# Altium PCB Mach_In.PcbDoc
Units mm, origin at the board's own origin, x right, y up, seen from the top; angles counter-clockwise.
Board outline 115.95 x 75.06 mm, 2 copper layers (Top Layer, Bottom Layer); 84 components, 24 nets, 357 pads, 0 vias.
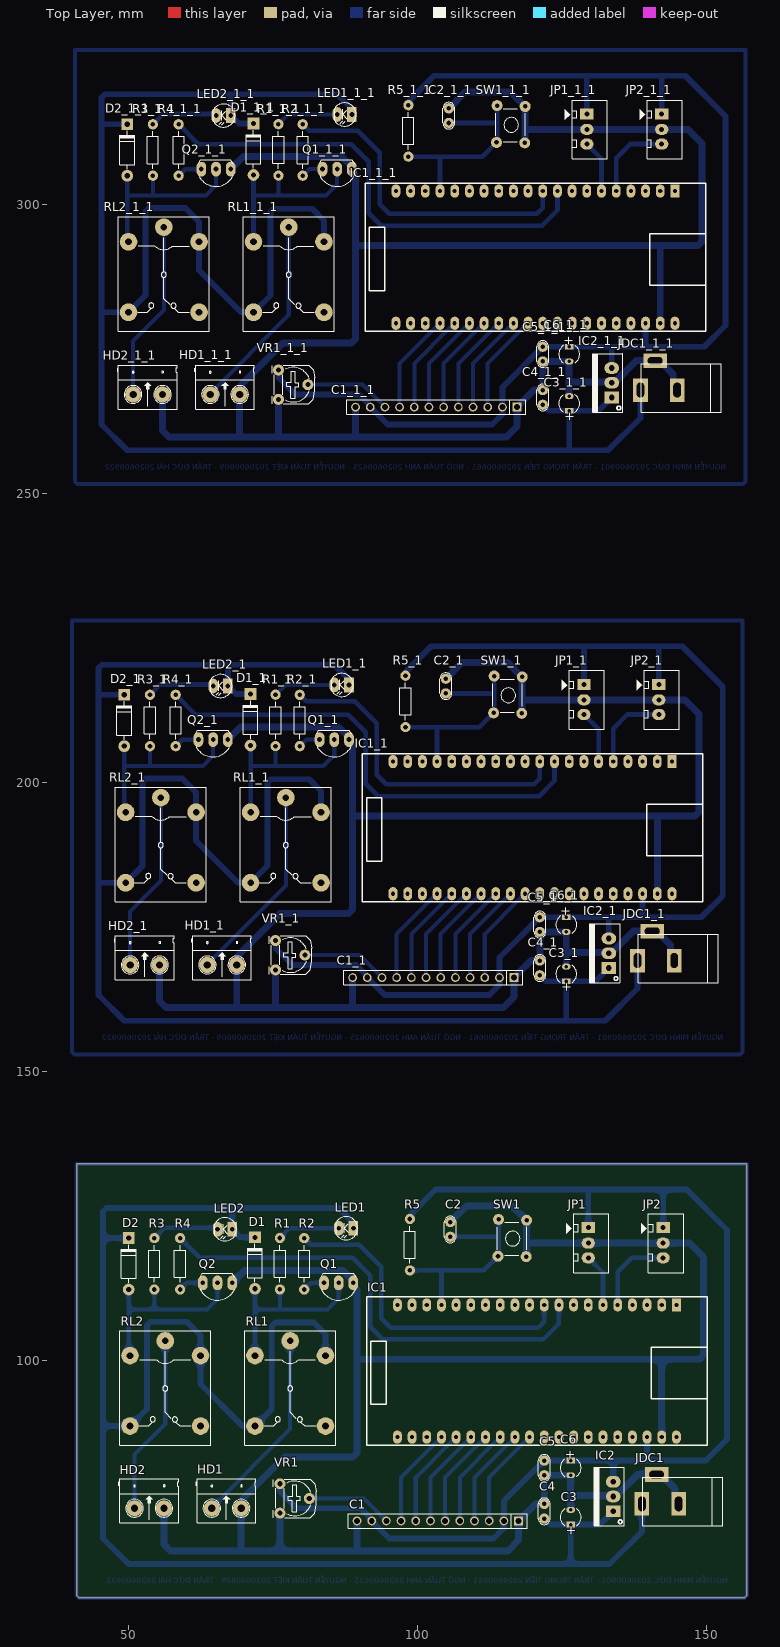
[diagram p0: Top Layer view]
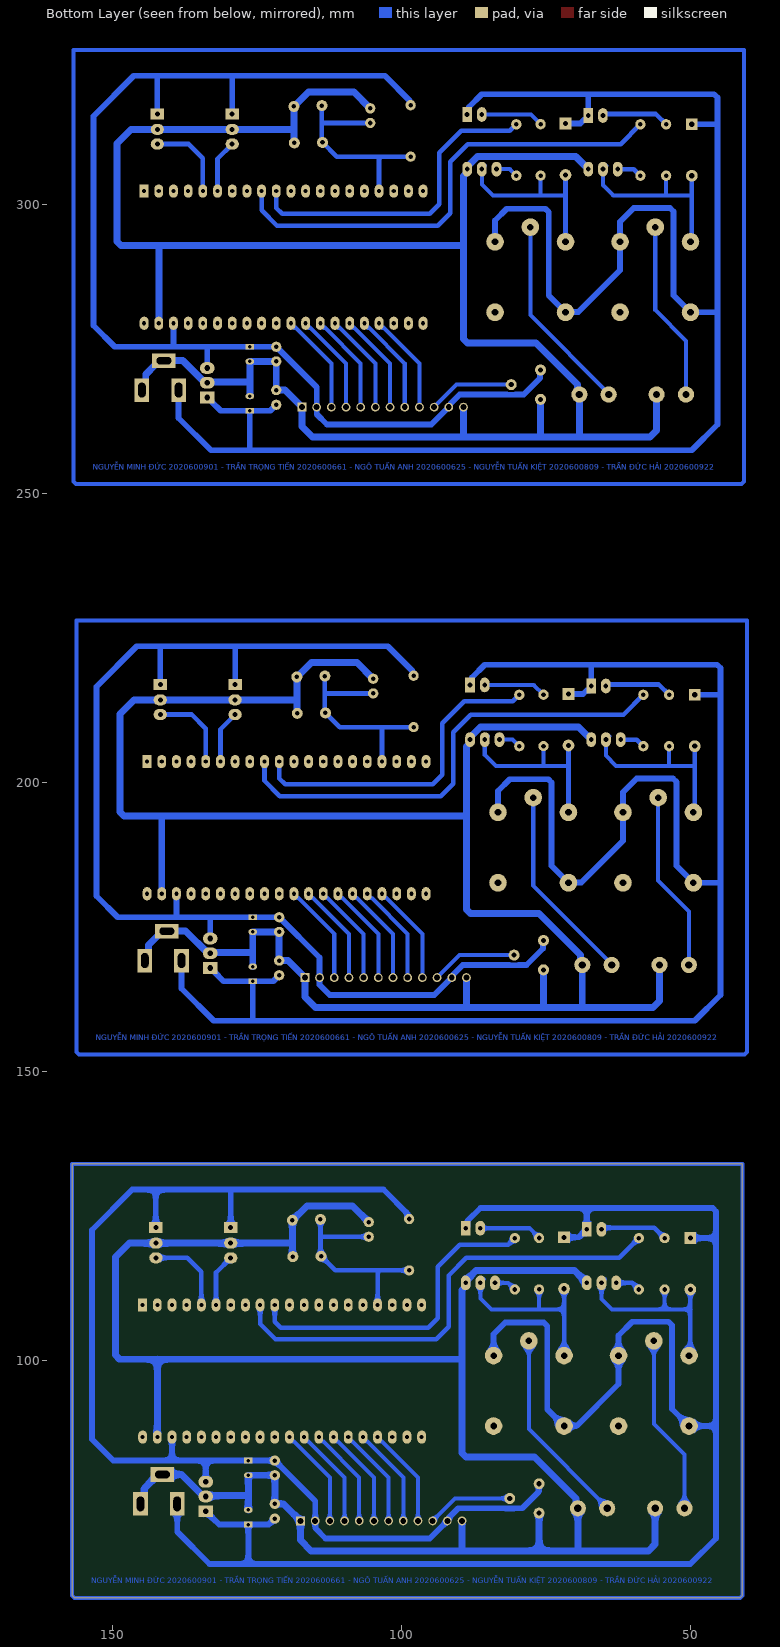
[diagram p1: Bottom Layer view, seen from below]

## Layer stack, top to bottom
Top Solder: solder mask 0.0102, Solder Resist, Dk 3.5
Top Layer: signal copper 0.0356
Dielectric 1: dielectric 0.32, FR-4, Dk 4.8
Bottom Layer: signal copper 0.0356
Bottom Solder: solder mask 0.0102, Solder Resist, Dk 3.5

## Board outline
41.431,58.928 41.021,59.338 41.021,133.985 156.972,133.985 156.972,59.338 156.562,58.928

## Design rules (kind name [scope] priority, off if disabled: settings)
Clearance [All] p1: gap=0.3 ignorepadtopadclearanceinfootprint=FALSE
PolygonConnect [All] p1: connectstyle=Relief reliefconductorwidth=0.254 reliefentries=4 polygonreliefangle="90 Angle" airgapwidth=0.254
RoutingVias [All] p1: holewidth=0.711 width=1.27 viastyle="Through Hole" minholewidth=0.711 minwidth=1.27 maxholewidth=0.711 maxwidth=1.27
SolderMaskExpansion [All] p1: expansion=0.102 istentingtop=FALSE
Width [All] p1: maxlimit=1.2 minlimit=0.7 preferedwidth=1
30 further rules are at their usual default settings.

## Classes and differential pairs
component class Nguyen_Ly: C1 C2 D1 D2 HD1 HD2 IC1 IC2 JDC1 JP1 JP2 LED1 LED2 Q1 Q2 R1 R2 R3 R4 R5 RL1 RL2 SW1 VR1

## Components (designator, comment, footprint, x,y, rotation, side; value= is the part's Value field where it differs from the comment)
C1 "JP12" JP12-C1T 117.475,72.238 r180 top
C1_1 "JP12" JP12-C1T 116.713,166.218 r180 top (schematic designator C1)
C1_1_1 "JP12" JP12-C1T 117.221,264.897 r180 top (schematic designator C1)
C2 "100NF" CN1 105.664,123.928 r270 top value=100pF
C2_1 "100NF" CN1 104.902,217.908 r270 top value=100pF (schematic designator C2)
C2_1_1 "100NF" CN1 105.41,316.587 r270 top value=100pF (schematic designator C2)
C3 "Cap Pol" C3MM 126.492,72.867 r90 top
C3_1 "Cap Pol" C3MM 125.73,166.847 r90 top (schematic designator C3)
C3_1_1 "Cap Pol" C3MM 126.238,265.526 r90 top (schematic designator C3)
C4 "100NF" CN1 121.92,75.184 r270 top value=100pF
C4_1 "100NF" CN1 121.158,169.164 r270 top value=100pF (schematic designator C4)
C4_1_1 "100NF" CN1 121.666,267.843 r270 top value=100pF (schematic designator C4)
C5 "100NF" CN1 121.92,80.137 r90 top value=100pF
C5_1 "100NF" CN1 121.158,174.117 r90 top value=100pF (schematic designator C5)
C5_1_1 "100NF" CN1 121.666,272.796 r90 top value=100pF (schematic designator C5)
C6 "Cap Pol" C3MM 126.492,81.407 r270 top
C6_1 "Cap Pol" C3MM 125.73,175.387 r270 top (schematic designator C6)
C6_1_1 "Cap Pol" C3MM 126.238,274.066 r270 top (schematic designator C6)
D1 "1N4007" D1A 71.882,112.395 r270 top
D1_1 "1N4007" D1A 71.12,206.375 r270 top (schematic designator D1)
D1_1_1 "1N4007" D1A 71.628,305.054 r270 top (schematic designator D1)
D2 "1N4007" D1A 50.038,112.268 r270 top
D2_1 "1N4007" D1A 49.276,206.248 r270 top (schematic designator D2)
D2_1_1 "1N4007" D1A 49.784,304.927 r270 top (schematic designator D2)
HD1 "Header 2" HED2 64.414,74.424 r0 top
HD1_1 "Header 2" HED2 63.652,168.404 r0 top (schematic designator HD1)
HD1_1_1 "Header 2" HED2 64.16,267.083 r0 top (schematic designator HD1)
HD2 "Header 2" HED2 51.054,74.424 r0 top
HD2_1 "Header 2" HED2 50.292,168.404 r0 top (schematic designator HD2)
HD2_1_1 "Header 2" HED2 50.8,267.083 r0 top (schematic designator HD2)
IC1 "STM32F103C8T6" DIP40 144.78,109.601 r270 top
IC1_1 "STM32F103C8T6" DIP40 144.018,203.581 r270 top (schematic designator IC1)
IC1_1_1 "STM32F103C8T6" DIP40 144.526,302.26 r270 top (schematic designator IC1)
IC2 "LM7805" QTO-220 133.858,73.914 r90 top
IC2_1 "LM7805" QTO-220 133.096,167.894 r90 top (schematic designator IC2)
IC2_1_1 "LM7805" QTO-220 133.604,266.573 r90 top (schematic designator IC2)
JDC1 "Jac DC" DC-IN 141.986,77.727 r180 top
JDC1_1 "Jac DC" DC-IN 141.224,171.707 r180 top (schematic designator JDC1)
JDC1_1_1 "Jac DC" DC-IN 141.732,270.386 r180 top (schematic designator JDC1)
JP1 "JP3" CON3 129.54,122.822 r270 top value="Connector 3"
JP1_1 "JP3" CON3 128.778,216.802 r270 top value="Connector 3" (schematic designator JP1)
JP1_1_1 "JP3" CON3 129.286,315.481 r270 top value="Connector 3" (schematic designator JP1)
JP2 "JP3" CON3 142.494,122.822 r270 top value="Connector 3"
JP2_1 "JP3" CON3 141.732,216.802 r270 top value="Connector 3" (schematic designator JP2)
JP2_1_1 "JP3" CON3 142.24,315.481 r270 top value="Connector 3" (schematic designator JP2)
LED1 "LED" LED-3 88.913,122.862 r180 top value="LED 3 ly Single Colour"
LED1_1 "LED" LED-3 88.151,216.842 r180 top value="LED 3 ly Single Colour" (schematic designator LED1)
LED1_1_1 "LED" LED-3 88.659,315.521 r180 top value="LED 3 ly Single Colour" (schematic designator LED1)
LED2 "LED" LED-3 67.958,122.682 r180 top value="LED 3 ly Single Colour"
LED2_1 "LED" LED-3 67.196,216.662 r180 top value="LED 3 ly Single Colour" (schematic designator LED2)
LED2_1_1 "LED" LED-3 67.704,315.341 r180 top value="LED 3 ly Single Colour" (schematic designator LED2)
Q1 "C1815" QTO-92 86.36,113.411 r180 top
Q1_1 "C1815" QTO-92 85.598,207.391 r180 top (schematic designator Q1)
Q1_1_1 "C1815" QTO-92 86.106,306.07 r180 top (schematic designator Q1)
Q2 "C1815" QTO-92 65.405,113.411 r180 top
Q2_1 "C1815" QTO-92 64.643,207.391 r180 top (schematic designator Q2)
Q2_1_1 "C1815" QTO-92 65.151,306.07 r180 top (schematic designator Q2)
R1 "4.7k" R1/4W 76.2,112.283 r90 top value="R1/4W - 1K"
R1_1 "4.7k" R1/4W 75.438,206.263 r90 top value="R1/4W - 1K" (schematic designator R1)
R1_1_1 "4.7k" R1/4W 75.946,304.942 r90 top value="R1/4W - 1K" (schematic designator R1)
R2 "1k" R1/4W 80.391,112.268 r90 top value="R1/4W - 1K"
R2_1 "1k" R1/4W 79.629,206.248 r90 top value="R1/4W - 1K" (schematic designator R2)
R2_1_1 "1k" R1/4W 80.137,304.927 r90 top value="R1/4W - 1K" (schematic designator R2)
R3 "4.7k" R1/4W 54.483,112.268 r90 top value="R1/4W - 1K"
R3_1 "4.7k" R1/4W 53.721,206.248 r90 top value="R1/4W - 1K" (schematic designator R3)
R3_1_1 "4.7k" R1/4W 54.229,304.927 r90 top value="R1/4W - 1K" (schematic designator R3)
R4 "1k" R1/4W 58.928,112.268 r90 top value="R1/4W - 1K"
R4_1 "1k" R1/4W 58.166,206.248 r90 top value="R1/4W - 1K" (schematic designator R4)
R4_1_1 "1k" R1/4W 58.674,304.927 r90 top value="R1/4W - 1K" (schematic designator R4)
R5 "1k" R1/4W 98.679,115.57 r90 top value="R1/4W - 1K"
R5_1 "1k" R1/4W 97.917,209.55 r90 top value="R1/4W - 1K" (schematic designator R5)
R5_1_1 "1k" R1/4W 98.425,308.229 r90 top value="R1/4W - 1K" (schematic designator R5)
RL1 "Relay 10A/5V" "RELAY 5" 77.978,95.123 r270 top value="Relay SPDT, 10A, 12V"
RL1_1 "Relay 10A/5V" "RELAY 5" 77.216,189.103 r270 top value="Relay SPDT, 10A, 12V" (schematic designator RL1)
RL1_1_1 "Relay 10A/5V" "RELAY 5" 77.724,287.782 r270 top value="Relay SPDT, 10A, 12V" (schematic designator RL1)
RL2 "Relay 10A/5V" "RELAY 5" 56.363,95.123 r270 top value="Relay SPDT, 10A, 12V"
RL2_1 "Relay 10A/5V" "RELAY 5" 55.601,189.103 r270 top value="Relay SPDT, 10A, 12V" (schematic designator RL2)
RL2_1_1 "Relay 10A/5V" "RELAY 5" 56.109,287.782 r270 top value="Relay SPDT, 10A, 12V" (schematic designator RL2)
SW1 "SW" SW4 118.872,124.244 r270 top value="Button chip 4 pin"
SW1_1 "SW" SW4 118.11,218.224 r270 top value="Button chip 4 pin" (schematic designator SW1)
SW1_1_1 "SW" SW4 118.618,316.903 r270 top value="Button chip 4 pin" (schematic designator SW1)
VR1 "10K" VR 76.2,78.662 r270 top value="VR 10K"
VR1_1 "10K" VR 75.438,172.642 r270 top value="VR 10K" (schematic designator VR1)
VR1_1_1 "10K" VR 75.946,271.321 r270 top value="VR 10K" (schematic designator VR1)

## Footprints (in the part's own frame and the unit in brackets; to place one, negate y for a bottom-side part, rotate by r counter-clockwise, add the part's x,y. Pads: shape width x height; smd on the part's side, far side on the other; paste and mask are expansions set on the pad)
C3MM [mm]
  rect 1x1.5 hole 0.6: 1(-1.27,0)
  oval 1x1.5 hole 0.6: 2(1.27,0)
  silkscreen extent -1.5,-1.81 1.5,1.8, body extent -2,-2.03 1.99,1.97, height 7.01
CN1 [mil]
  round 70 hole 31: 1(0,0) 2(100,0)
  silkscreen extent -40,-40 141,40, body extent -60,-30 170,37, height 265
CON3 [mil] "CON 3"
  rect 75x90 hole 34: 1(-5,0)
  oval 75x90 hole 34: 2(100,0) 3(200,0)
  silkscreen extent -100,-150 300,140, body extent -95,-90 295,136, height 276
D1A [mil] "Diode 1A, W 100mil, L 350mil"
  round 80 hole 35: 1(0,0)
  rect 80x80 hole 35: 2(-350,0)
  silkscreen extent -305,-50 -45,50, body extent -386,-33 34,36, height 84
DC-IN [mil] "Jac DC input"
  rect 100x160 hole 50 slot 100 at 90 deg: 1(125,100) 2(-125,100)
  rect 160x100 hole 50 slot 100 at 0 deg: 3(25,-100)
  silkscreen extent -425,-80 120,250, body extent -410,-105 134,269, height 434
DIP40 [mil]
  rect 90x60 hole 27.99: 1(0,0)
  oval 90x60 hole 27.99: 2(0,-100) 3(0,-200) 4(0,-300) 5(0,-400) 6(0,-500) 7(0,-600) 8(0,-700) 9(0,-800) 10(0,-900) 11(0,-1000) 12(0,-1100) 13(0,-1200) 14(0,-1300) 15(0,-1400) 16(0,-1500) 17(0,-1600) 18(0,-1700) 19(0,-1800) 20(0,-1900) 21(900,-1900) 22(900,-1800) 23(900,-1700) 24(900,-1600) 25(900,-1500) 26(900,-1400) 27(900,-1300) 28(900,-1200) 29(900,-1100) 30(900,-1000) 31(900,-900) 32(900,-800) 33(900,-700) 34(900,-600) 35(900,-500) 36(900,-400) 37(900,-300) 38(900,-200) 39(900,-100) 40(900,0)
  silkscreen extent -55,-2110 955,210, body extent -55,-2105 955,213, height 503
HED2 [mil] "Header 2, 2 pin, hight 300mil, Pin to Pin 200, Colour Green"
  round 110 hole 50: 1(0,0) 2(200,0)
  silkscreen extent -106,-100 300,200, body extent -92,-140 302,155, height 394
JP12-C1T [mm] "12 row, straight, gold plating"
  rect 1.52x1.52 hole 1.02: 1(0,0)
  round 1.52 hole 1.02: 2(2.54,0) 3(5.08,0) 4(7.62,0) 5(10.16,0) 6(12.7,0) 7(15.24,0) 8(17.78,0) 9(20.32,0) 10(22.86,0) 11(25.4,0) 12(27.94,0)
  silkscreen extent -1.52,-1.27 29.46,1.27, body extent -1.52,-1.25 29.46,1.25, height 8.51
LED-3 [mil] "LED 2 PIN, 3ly Only colour"
  rect 65x100 hole 32: 1(0,0)
  oval 65x100 hole 32: 2(100,0)
  silkscreen extent -29,-78 118,79, body extent -13,-75 125,75, height 217
QTO-92 [mil] "TO-92"
  oval 66x100 hole 32: 1(-100,0) 2(0,0) 3(100,0)
  silkscreen extent -117,-65 120,118, body extent -109,-66 109,95, height 245
QTO-220 [mil] "TO-220 - 1-2-3"
  rect 80x100 hole 39: 1(0,0)
  oval 80x100 hole 39: 2(100,0) 3(200,0)
  silkscreen extent -100,-76 300,130, body extent -119,-64 322,121, height 755
R1/4W [mil] "R 1/4W, 2 Pin, 350mil"
  round 70 hole 31: 1(0,0) 2(350,0)
  silkscreen extent 48,-38 302,38, body extent -40,-47 386,47, height 111
"RELAY 5" [mil] "Reley DPDT, 8 pin, 1A, W400mil, L800mil,H 300mil"
  round 120 hole 45: 1(-325,0) 2(255,240) 3(255,-240) 4(-225,-240) 5(-225,240)
  silkscreen extent -395,-310 385,310, body extent -371,-304 381,306, height 602
SW4 [mil] "SW button 4pin, 250 x250 mil"
  round 75 hole 31: 1(0,0) 2(245,-195) 3(248,-3) 4(-6,-191)
  silkscreen extent 15,-215 240,0, body extent -36,-220 276,24, height 276
VR [mil] "Resistor Variable"
  round 75 hole 35: 1(0,0) 2(100,200) 3(200,0)
  silkscreen extent -31,-44 231,246, body extent -87,-30 307,372, height 165

## Part data
C1 C1_1 C1_1_1: "WR-PHD 2.54 mm Angled Socket Header", Manufacturer="W¨¹rth Elektronik eiSos GmbH", partNo=613012143121, ComponentLink1 Description=Manufacturer, ComponentLink1URL=http://www.we-online.com, ComponentLink2 Description=Datasheet, ComponentLink2URL=http://katalog.we-online.de/em/datasheet/6130xx143121.pdf, Created by="Karrer Zheng", Created Date="29 March 2013", NoPins=12
C2 C2_1 C2_1_1 C4 C4_1 C4_1_1 C5 C5_1 C5_1_1: library part CN1, "Cap np  1pF - 472pF"
C3 C3_1 C3_1_1 C6 C6_1 C6_1_1: "Polarized Capacitor (Axial)", LatestRevisionDate=17-Jul-2002, LatestRevisionNote="Re-released for DXP Platform.", PackageReference=POLAR0.8, Published=8-Jun-2000, Publisher="Altium Limited"
D1 D1_1 D1_1_1 D2 D2_1 D2_1_1: library part D1A, "Diode 1A"
HD1 HD1_1 HD1_1_1 HD2 HD2_1 HD2_1_1: library part Hed2, "Header 2 (Green)"
IC1 IC1_1 IC1_1_1: library part STM32F103C8T6_GREEN
IC2 IC2_1 IC2_1_1: library part LM78xx, "On ap +, from + 5 to + 24VDC"
JDC1 JDC1_1 JDC1_1_1: library part DCIN, "Jac DC input"
JP1 JP1_1 JP1_1_1 JP2 JP2_1 JP2_1_1: library part Con3, "Connector 3"
LED1 LED1_1 LED1_1_1 LED2 LED2_1 LED2_1_1: "LED Single colour Green and Red"
Q1 Q1_1 Q1_1_1 Q2 Q2_1 Q2_1_1: "NPN 600mW, ECB"
R1 R1_1 R1_1_1 R2 R2_1 R2_1_1 R3 R3_1 R3_1_1 R4 R4_1 R4_1_1 R5 R5_1 R5_1_1: library part R1/4W, "Resistor 1/4W"
RL1 RL1_1 RL1_1_1 RL2 RL2_1 RL2_1_1: library part "Relay 5", "Relay SPDT,10A - 12VDC 5 Pin"
SW1 SW1_1 SW1_1_1: library part SW4, "Switch button 4 pin"
VR1 VR1_1 VR1_1_1: library part VR, "Var Resistor"

## Nets (pads, with @x,y where several pads share a name; then routed paths per layer and width w, separated by ;. In a path a pad name is that pad's centre, name@x,y a point inside that pad or via, vN(x,y) a via of type N, cw(c..) or ccw(c..) an arc to the next point about the centre after c; other vN are vias at no path point)
+12: C3.1 C4.2 D1.2 D2.2 IC2.1 JDC1.1 LED1.1 LED2.1 RL1.3 RL1.5 RL2.3 RL2.5 | length 324.7
  Bottom Layer w1: D2.2 45.593,121.158 ; D1.2 69.355,121.285 68.728,121.912 68.283,121.912 67.958,122.237 LED2.1 67.958,126.365 ; RL1.5 84.074,104.521 82.042,106.553 75.389,106.553 74.803,105.967 74.803,91.567 RL1.3 71.823,88.705 69.664,88.705 62.459,95.91 62.459,104.292 60.071,106.68 53.799,106.68 53.213,106.094 53.213,91.592 RL2.3 45.593,88.646 ; LED1.1 88.587,123.188 88.587,124.138 86.36,126.365 67.958,126.365 ; C4.2 122.967,71.597 C3.1 ; IC2.1 133.604,73.914 133.088,73.398 133.088,73.144 131.541,71.597 C3.1 ; JDC1.1 138.811,70.358 133.223,64.77 126.492,64.77 ; 45.593,88.646 45.593,121.158 ; 45.593,88.646 45.593,69.215 50.038,64.77 126.492,64.77 ; 45.593,121.158 45.593,125.779 46.179,126.365 67.958,126.365 ; 126.492,64.77 C3.1
A8: C1.8 IC1.25 | length 17.5
  Bottom Layer w0.7: C1.8 99.695,79.756 105.908,85.969 106.066,85.969 106.68,86.583 IC1.25
A9: C1.7 IC1.26 | length 17.5
  Bottom Layer w0.7: C1.7 102.235,79.756 108.448,85.969 108.606,85.969 109.22,86.583 IC1.26
A10: C1.6 IC1.27 | length 17.5
  Bottom Layer w0.7: C1.6 104.775,79.756 110.988,85.969 111.146,85.969 111.76,86.583 IC1.27
A11: C1.5 IC1.28 | length 17.5
  Bottom Layer w0.7: C1.5 107.315,79.756 113.528,85.969 113.686,85.969 114.3,86.583 IC1.28
A12: C1.4 IC1.29 | length 17.5
  Bottom Layer w0.7: C1.4 109.855,79.756 116.068,85.969 116.226,85.969 116.84,86.583 IC1.29
A15: C1.3 IC1.30 | length 17.5
  Bottom Layer w0.7: C1.3 112.395,79.756 118.608,85.969 118.766,85.969 119.38,86.583 IC1.30
B15: C1.9 IC1.24 | length 17.5
  Bottom Layer w0.7: C1.9 97.155,79.756 103.368,85.969 103.526,85.969 104.14,86.583 IC1.24
BOM: IC1.9 R4.2 | length 82.4
  Bottom Layer w0.8: R4.2 62.357,117.729 88.773,117.729 91.821,114.681 91.821,105.791 93.98,103.632 121.793,103.632 124.46,106.299 IC1.9
DO_AM: IC1.5 JP2.3 | length 14.6
  Bottom Layer w0.8: IC1.5 134.62,115.316 137.046,117.742 JP2.3
GND: C1.1 C1.12 C2.1 C3.2 C4.1 C5.1 C6.2 HD1.2 HD2.2 IC1.39 IC2.2 JDC1.2 JDC1.3 JP1.2 JP2.2 Q1.1 Q2.1 SW1.1 SW1.3 VR1.3 | length 357.9
  Bottom Layer w1.2: HD2.2 56.134,68.199 57.277,67.056 69.469,67.056 ; Q2.1 67.945,113.714 68.165,113.934 68.468,113.934 70.115,115.581 87.08,115.581 88.9,113.761 Q1.1 88.9,112.85 89.535,112.215 89.535,99.949 ; VR1.3 76.2,67.056 ; C1.12 89.535,67.183 89.408,67.056 ; C2.1 108.482,126.746 116.37,126.746 SW1.1 118.872,120.396 ; SW1.3 118.872,118.021 118.872,120.396 ; C3.2 126.492,76.708 ; IC1.39 142.24,100.203 ; JDC1.2 144.491,75.857 144.491,77.889 142.783,79.597 142.113,80.267 138.095,80.267 134.282,76.454 IC2.2 133.702,76.61 126.59,76.61 126.492,76.708 ; 69.469,67.056 76.2,67.056 ; 69.469,67.056 69.494,67.081 HD1.2 69.799,74.729 69.799,76.149 76.962,83.312 88.832,83.312 89.535,84.015 89.535,99.949 ; 76.2,67.056 89.408,67.056 ; 89.408,67.056 115.629,67.056 117.475,68.902 C1.1 120.421,75.184 C4.1 C5.1 C6.2 126.492,76.708 ; 89.535,99.949 89.789,100.203 142.24,100.203 ; 118.872,120.396 118.986,120.282 JP1.2 JP2.2 147.053,120.282 149.479,117.856 149.479,100.906 148.776,100.203 142.24,100.203
LM35: IC1.6 JP1.3 | length 9.2
  Bottom Layer w0.8: JP1.3 132.08,115.202 IC1.6
NetD1_1: D1.1 Q1.2 R1.1 RL1.4 | length 33.9
  Bottom Layer w0.7: 71.882,108.839 76.073,108.839 ; R1.1 76.2,108.966 76.073,108.839 ; Q1.2 86.36,110.744 84.455,108.839 76.073,108.839
  Bottom Layer w0.8: RL1.4 71.882,108.839 D1.1 ; Q1.2@85.828,114.01 85.955,114.01 86.36,113.606 Q1.2
NetD2_1: D2.1 Q2.2 R3.1 RL2.4 | length 34.7
  Bottom Layer w0.7: 50.038,108.839 54.483,108.839 ; R3.1 54.483,108.839 ; Q2.2 65.405,110.617 63.627,108.839 54.483,108.839
  Bottom Layer w0.8: D2.1 50.038,108.839 50.038,101.067 RL2.4 ; Q2.2@64.873,114.01 65,114.01 65.405,113.606 Q2.2
NetHD1_1: HD1.1 RL1.1 | length 34.6
  Bottom Layer w0.7: HD1.1 64.414,74.574 77.978,88.138 RL1.1
NetHD2_1: HD2.1 RL2.1 | length 31.2
  Bottom Layer w0.7: HD2.1 51.054,83.693 56.363,89.002 RL2.1
NetLED1_2: LED1.2 R1.2 | length 10.9
  Bottom Layer w0.7: R1.2 77.889,122.862 LED1.2
NetLED2_2: LED2.2 R3.2 | length 11.8
  Bottom Layer w0.8: R3.2 56.261,122.936 65.164,122.936 LED2.2
NetQ1_3: Q1.3 R2.1 | length 3.9
  Bottom Layer w0.7: R2.1 81.534,113.411 Q1.3
NetQ2_3: Q2.3 R4.1 | length 4.4
  Bottom Layer w0.8: R4.1 60.071,113.411 Q2.3
QUAT: IC1.10 R2.2 | length 56.5
  Bottom Layer w0.8: R2.2 81.534,120.015 89.916,120.015 93.726,116.205 93.726,107.315 95.377,105.664 120.904,105.664 121.92,106.68 IC1.10
RST: C2.2 IC1.17 R5.1 SW1.2 SW1.4 | length 37.2
  Bottom Layer w0.8: R5.1 103.759,115.57 ; IC1.17 104.14,115.189 103.759,115.57 ; C2.2 113.892,121.388 114.021,121.26 ; SW1.4 114.021,121.26 ; 103.759,115.57 111.468,115.57 SW1.2 114.021,118.123 114.021,121.26
V0: C1.10 VR1.2 | length 14.9
  Bottom Layer w0.7: VR1.2 90.731,76.122 C1.10
VCC: C1.2 C1.11 C5.2 C6.1 IC1.38 IC2.3 JP1.1 JP2.1 R5.2 VR1.1 | length 209.5
  Bottom Layer w1: VR1.1 76.275,78.587 76.275,77.268 79.121,74.422 80.501,74.422 80.554,74.369 82.006,74.369 82.059,74.422 90.17,74.422 91.815,72.777 91.815,72.638 92.075,72.378 C1.11 95.098,69.215 113.157,69.215 114.935,70.993 114.935,75.692 C5.2 C6.1 133.858,82.677 ; R5.2 98.828,124.609 98.828,125.244 103.124,129.54 129.413,129.54 ; JP1.1 129.54,129.413 129.413,129.54 ; IC2.3 133.858,82.677 ; IC1.38 139.7,82.677 ; JP2.1 142.494,129.54 ; 129.413,129.54 142.494,129.54 ; 133.858,82.677 139.7,82.677 ; 139.7,82.677 149.86,82.677 153.543,86.36 153.543,122.555 146.558,129.54 142.494,129.54
pads on no net: C1_1.1 C1_1.2 C1_1.3 C1_1.4 C1_1.5 C1_1.6 C1_1.7 C1_1.8 C1_1.9 C1_1.10 C1_1.11 C1_1.12 C1_1_1.1 C1_1_1.2 C1_1_1.3 C1_1_1.4 C1_1_1.5 C1_1_1.6 C1_1_1.7 C1_1_1.8 C1_1_1.9 C1_1_1.10 C1_1_1.11 C1_1_1.12 C2_1.1 C2_1.2 C2_1_1.1 C2_1_1.2 C3_1.1 C3_1.2 C3_1_1.1 C3_1_1.2 C4_1.1 C4_1.2 C4_1_1.1 C4_1_1.2 C5_1.1 C5_1.2 C5_1_1.1 C5_1_1.2 C6_1.1 C6_1.2 C6_1_1.1 C6_1_1.2 D1_1.1 D1_1.2 D1_1_1.1 D1_1_1.2 D2_1.1 D2_1.2 D2_1_1.1 D2_1_1.2 HD1_1.1 HD1_1.2 HD1_1_1.1 HD1_1_1.2 HD2_1.1 HD2_1.2 HD2_1_1.1 HD2_1_1.2 IC1.1 IC1.2 IC1.3 IC1.4 IC1.7 IC1.8 IC1.11 IC1.12 IC1.13 IC1.14 IC1.15 IC1.16 IC1.18 IC1.19 IC1.20 IC1.21 IC1.22 IC1.23 IC1.31 IC1.32 IC1.33 IC1.34 IC1.35 IC1.36 IC1.37 IC1.40 IC1_1.1 IC1_1.2 IC1_1.3 IC1_1.4 IC1_1.5 IC1_1.6 IC1_1.7 IC1_1.8 IC1_1.9 IC1_1.10 IC1_1.11 IC1_1.12 IC1_1.13 IC1_1.14 IC1_1.15 IC1_1.16 IC1_1.17 IC1_1.18 IC1_1.19 IC1_1.20 IC1_1.21 IC1_1.22 IC1_1.23 IC1_1.24 IC1_1.25 IC1_1.26 IC1_1.27 IC1_1.28 IC1_1.29 IC1_1.30 IC1_1.31 IC1_1.32 IC1_1.33 IC1_1.34 IC1_1.35 IC1_1.36 IC1_1.37 IC1_1.38 IC1_1.39 IC1_1.40 IC1_1_1.1 IC1_1_1.2 IC1_1_1.3 IC1_1_1.4 IC1_1_1.5 IC1_1_1.6 IC1_1_1.7 IC1_1_1.8 IC1_1_1.9 IC1_1_1.10 IC1_1_1.11 IC1_1_1.12 IC1_1_1.13 IC1_1_1.14 IC1_1_1.15 IC1_1_1.16 IC1_1_1.17 IC1_1_1.18 IC1_1_1.19 IC1_1_1.20 IC1_1_1.21 IC1_1_1.22 IC1_1_1.23 IC1_1_1.24 IC1_1_1.25 IC1_1_1.26 IC1_1_1.27 IC1_1_1.28 IC1_1_1.29 IC1_1_1.30 IC1_1_1.31 IC1_1_1.32 IC1_1_1.33 IC1_1_1.34 IC1_1_1.35 IC1_1_1.36 IC1_1_1.37 IC1_1_1.38 IC1_1_1.39 IC1_1_1.40 IC2_1.1 IC2_1.2 IC2_1.3 IC2_1_1.1 IC2_1_1.2 IC2_1_1.3 JDC1_1.1 JDC1_1.2 JDC1_1.3 JDC1_1_1.1 JDC1_1_1.2 JDC1_1_1.3 JP1_1.1 JP1_1.2 JP1_1.3 JP1_1_1.1 JP1_1_1.2 JP1_1_1.3 JP2_1.1 JP2_1.2 JP2_1.3 JP2_1_1.1 JP2_1_1.2 JP2_1_1.3 LED1_1.1 LED1_1.2 LED1_1_1.1 LED1_1_1.2 LED2_1.1 LED2_1.2 LED2_1_1.1 LED2_1_1.2 Q1_1.1 Q1_1.2 Q1_1.3 Q1_1_1.1 Q1_1_1.2 Q1_1_1.3 Q2_1.1 Q2_1.2 Q2_1.3 Q2_1_1.1 Q2_1_1.2 Q2_1_1.3 R1_1.1 R1_1.2 R1_1_1.1 R1_1_1.2 R2_1.1 R2_1.2 R2_1_1.1 R2_1_1.2 R3_1.1 R3_1.2 R3_1_1.1 R3_1_1.2 R4_1.1 R4_1.2 R4_1_1.1 R4_1_1.2 R5_1.1 R5_1.2 R5_1_1.1 R5_1_1.2 RL1.2 RL1_1.1 RL1_1.2 RL1_1.3 RL1_1.4 RL1_1.5 RL1_1_1.1 RL1_1_1.2 RL1_1_1.3 RL1_1_1.4 RL1_1_1.5 RL2.2 RL2_1.1 RL2_1.2 RL2_1.3 RL2_1.4 RL2_1.5 RL2_1_1.1 RL2_1_1.2 RL2_1_1.3 RL2_1_1.4 RL2_1_1.5 SW1_1.1 SW1_1.2 SW1_1.3 SW1_1.4 SW1_1_1.1 SW1_1_1.2 SW1_1_1.3 SW1_1_1.4 VR1_1.1 VR1_1.2 VR1_1.3 VR1_1_1.1 VR1_1_1.2 VR1_1_1.3
copper on no net: | length 3934.1
  Bottom Layer w0.7: 49.276,202.819 53.721,202.819 ; 49.784,301.498 54.229,301.498 ; 50.292,168.404 50.292,177.673 55.601,182.982 55.601,197.358 ; 50.8,267.083 50.8,276.352 56.109,281.661 56.109,296.037 ; 53.721,206.248 53.721,202.819 ; 54.229,304.927 54.229,301.498 ; 63.652,168.404 63.652,168.554 77.216,182.118 77.216,197.358 ; 64.16,267.083 64.16,267.233 77.724,280.797 77.724,296.037 ; 64.643,207.391 64.643,204.597 62.865,202.819 53.721,202.819 ; 65.151,306.07 65.151,303.276 63.373,301.498 54.229,301.498 ; 71.12,202.819 75.311,202.819 ; 71.628,301.498 75.819,301.498 ; 75.438,206.263 75.438,202.946 75.311,202.819 ; 75.438,215.153 77.127,216.842 85.611,216.842 ; 75.946,304.942 75.946,301.625 75.819,301.498 ; 75.946,313.832 77.635,315.521 86.119,315.521 ; 79.629,206.248 80.772,207.391 83.058,207.391 ; 80.137,304.927 81.28,306.07 83.566,306.07 ; 80.518,170.102 89.969,170.102 93.853,166.218 ; 81.026,268.781 90.477,268.781 94.361,264.897 ; 85.598,207.391 85.598,204.724 83.693,202.819 75.311,202.819 ; 86.106,306.07 86.106,303.403 84.201,301.498 75.819,301.498 ; 96.393,166.218 96.393,173.736 102.606,179.949 102.764,179.949 103.378,180.563 103.378,180.721 ; 96.901,264.897 96.901,272.415 103.114,278.628 103.272,278.628 103.886,279.242 103.886,279.4 ; 98.933,166.218 98.933,173.736 105.146,179.949 105.304,179.949 105.918,180.563 105.918,180.721 ; 99.441,264.897 99.441,272.415 105.654,278.628 105.812,278.628 106.426,279.242 106.426,279.4 ; 101.473,166.218 101.473,173.736 107.686,179.949 107.844,179.949 108.458,180.563 108.458,180.721 ; 101.981,264.897 101.981,272.415 108.194,278.628 108.352,278.628 108.966,279.242 108.966,279.4 ; 104.013,166.218 104.013,173.736 110.226,179.949 110.384,179.949 110.998,180.563 110.998,180.721 ; 104.521,264.897 104.521,272.415 110.734,278.628 110.892,278.628 111.506,279.242 111.506,279.4 ; 106.553,166.218 106.553,173.736 112.766,179.949 112.924,179.949 113.538,180.563 113.538,180.721 ; 107.061,264.897 107.061,272.415 113.274,278.628 113.432,278.628 114.046,279.242 114.046,279.4 ; 109.093,166.218 109.093,173.736 115.306,179.949 115.464,179.949 116.078,180.563 116.078,180.721 ; 109.601,264.897 109.601,272.415 115.814,278.628 115.972,278.628 116.586,279.242 116.586,279.4 ; 111.633,166.218 111.633,173.736 117.846,179.949 118.004,179.949 118.618,180.563 118.618,180.721 ; 112.141,264.897 112.141,272.415 118.354,278.628 118.512,278.628 119.126,279.242 119.126,279.4 ; 40.259,153.318 40.669,152.908 155.8,152.908 156.21,153.318 156.21,227.965 40.259,227.965 40.259,153.318 ; 40.767,251.997 40.767,326.644 156.718,326.644 156.718,251.997 156.308,251.587 41.177,251.587 40.767,251.997 ; 41.021,59.338 41.021,133.985 156.972,133.985 156.972,59.338 156.562,58.928 41.431,58.928 41.021,59.338
  Bottom Layer w0.8: 49.276,206.248 49.276,202.819 49.276,195.047 49.505,194.818 ; 49.784,304.927 49.784,301.498 49.784,293.726 50.013,293.497 ; 53.721,215.138 55.499,216.916 64.402,216.916 64.656,216.662 ; 54.229,313.817 56.007,315.595 64.91,315.595 65.164,315.341 ; 58.166,206.248 59.309,207.391 62.103,207.391 ; 58.166,215.138 61.595,211.709 88.011,211.709 91.059,208.661 91.059,199.771 93.218,197.612 121.031,197.612 123.698,200.279 123.698,203.581 ; 58.674,304.927 59.817,306.07 62.611,306.07 ; 58.674,313.817 62.103,310.388 88.519,310.388 91.567,307.34 91.567,298.45 93.726,296.291 121.539,296.291 124.206,298.958 124.206,302.26 ; 64.111,207.99 64.238,207.99 64.643,207.586 64.643,207.391 ; 64.619,306.669 64.746,306.669 65.151,306.265 65.151,306.07 ; 71.12,194.818 71.12,202.819 71.12,206.375 ; 71.628,293.497 71.628,301.498 71.628,305.054 ; 79.629,215.138 80.772,213.995 89.154,213.995 92.964,210.185 92.964,201.295 94.615,199.644 120.142,199.644 121.158,200.66 121.158,203.581 ; 80.137,313.817 81.28,312.674 89.662,312.674 93.472,308.864 93.472,299.974 95.123,298.323 120.65,298.323 121.666,299.339 121.666,302.26 ; 85.066,207.99 85.193,207.99 85.598,207.586 85.598,207.391 ; 85.574,306.669 85.701,306.669 86.106,306.265 86.106,306.07 ; 97.917,209.55 102.997,209.55 ; 98.425,308.229 103.505,308.229 ; 103.378,203.581 103.378,209.169 102.997,209.55 ; 103.886,302.26 103.886,307.848 103.505,308.229 ; 104.902,215.368 113.13,215.368 113.259,215.24 ; 105.41,314.047 113.638,314.047 113.767,313.919 ; 113.259,218.376 113.259,215.24 ; 113.767,317.055 113.767,313.919 ; 128.778,211.722 131.318,209.182 131.318,203.581 ; 129.286,310.401 131.826,307.861 131.826,302.26 ; 133.858,203.581 133.858,209.296 136.284,211.722 141.732,211.722 ; 134.366,302.26 134.366,307.975 136.792,310.401 142.24,310.401 ; 102.997,209.55 110.706,209.55 113.157,212.001 113.259,212.103 113.259,215.24 ; 103.505,308.229 111.214,308.229 113.665,310.68 113.767,310.782 113.767,313.919
  Bottom Layer w1: 49.276,215.138 44.831,215.138 ; 49.784,313.817 45.339,313.817 ; 71.12,215.265 68.593,215.265 67.966,215.892 67.521,215.892 67.196,216.218 67.196,216.662 67.196,220.345 ; 71.628,313.944 69.101,313.944 68.474,314.571 68.029,314.571 67.704,314.897 67.704,315.341 67.704,319.024 ; 75.438,172.642 75.513,172.567 75.513,171.248 78.359,168.402 79.739,168.402 79.792,168.349 81.244,168.349 81.297,168.402 89.408,168.402 91.053,166.757 91.053,166.618 91.313,166.358 91.313,166.218 94.336,163.195 112.395,163.195 114.173,164.973 114.173,169.672 121.158,176.657 125.73,176.657 133.096,176.657 ; 75.946,271.321 76.021,271.246 76.021,269.927 78.867,267.081 80.247,267.081 80.3,267.028 81.752,267.028 81.805,267.081 89.916,267.081 91.561,265.436 91.561,265.297 91.821,265.037 91.821,264.897 94.844,261.874 112.903,261.874 114.681,263.652 114.681,268.351 121.666,275.336 126.238,275.336 133.604,275.336 ; 83.312,194.818 83.312,198.501 81.28,200.533 74.627,200.533 74.041,199.947 74.041,185.547 71.12,182.626 71.061,182.685 68.902,182.685 61.697,189.89 61.697,198.272 59.309,200.66 53.037,200.66 52.451,200.074 52.451,185.572 49.505,182.626 44.831,182.626 ; 83.82,293.497 83.82,297.18 81.788,299.212 75.135,299.212 74.549,298.626 74.549,284.226 71.628,281.305 71.569,281.364 69.41,281.364 62.205,288.569 62.205,296.951 59.817,299.339 53.545,299.339 52.959,298.753 52.959,284.251 50.013,281.305 45.339,281.305 ; 88.151,216.842 87.825,217.168 87.825,218.118 85.598,220.345 67.196,220.345 ; 88.659,315.521 88.333,315.847 88.333,316.797 86.106,319.024 67.704,319.024 ; 97.917,218.44 98.066,218.589 98.066,219.224 102.362,223.52 128.651,223.52 ; 98.425,317.119 98.574,317.268 98.574,317.903 102.87,322.199 129.159,322.199 ; 121.158,166.624 122.205,165.577 125.73,165.577 ; 121.666,265.303 122.713,264.256 126.238,264.256 ; 128.778,216.929 128.778,223.393 128.651,223.52 ; 129.286,315.608 129.286,322.072 129.159,322.199 ; 133.096,167.894 132.842,167.894 132.326,167.378 132.326,167.124 130.779,165.577 125.73,165.577 ; 133.096,172.974 133.096,176.657 ; 133.604,266.573 133.35,266.573 132.834,266.057 132.834,265.803 131.287,264.256 126.238,264.256 ; 133.604,271.653 133.604,275.336 ; 138.049,169.167 138.049,164.338 132.461,158.75 125.73,158.75 ; 138.557,267.846 138.557,263.017 132.969,257.429 126.238,257.429 ; 138.938,180.721 138.938,176.657 ; 139.446,279.4 139.446,275.336 ; 141.732,216.929 141.732,223.52 ; 142.24,315.608 142.24,322.199 ; 44.831,182.626 44.831,163.195 49.276,158.75 125.73,158.75 ; 44.831,182.626 44.831,215.138 ; 44.831,215.138 44.831,219.759 45.417,220.345 67.196,220.345 ; 45.339,281.305 45.339,313.817 ; 45.339,281.305 45.339,261.874 49.784,257.429 126.238,257.429 ; 45.339,313.817 45.339,318.438 45.925,319.024 67.704,319.024 ; 125.73,158.75 125.73,165.577 ; 126.238,257.429 126.238,264.256 ; 128.651,223.52 141.732,223.52 ; 129.159,322.199 142.24,322.199 ; 133.096,176.657 138.938,176.657 ; 133.604,275.336 139.446,275.336 ; 138.938,176.657 149.098,176.657 152.781,180.34 152.781,216.535 145.796,223.52 141.732,223.52 ; 139.446,275.336 149.606,275.336 153.289,279.019 153.289,315.214 146.304,322.199 142.24,322.199
  Bottom Layer w1.2: 55.372,168.404 55.372,162.179 56.515,161.036 68.707,161.036 ; 55.88,267.083 55.88,260.858 57.023,259.715 69.215,259.715 ; 67.183,207.391 67.183,207.694 67.403,207.914 67.706,207.914 69.353,209.561 86.318,209.561 88.138,207.741 88.138,207.391 88.138,206.83 88.773,206.195 88.773,193.929 ; 67.691,306.07 67.691,306.373 67.911,306.593 68.214,306.593 69.861,308.24 86.826,308.24 88.646,306.42 88.646,306.07 88.646,305.509 89.281,304.874 89.281,292.608 ; 75.438,167.562 75.438,161.036 ; 75.946,266.241 75.946,259.715 ; 88.773,166.218 88.773,161.163 88.646,161.036 ; 89.281,264.897 89.281,259.842 89.154,259.715 ; 104.902,217.908 107.72,220.726 115.608,220.726 118.11,218.224 118.11,214.376 ; 105.41,316.587 108.228,319.405 116.116,319.405 118.618,316.903 118.618,313.055 ; 118.034,211.925 118.11,212.001 118.11,214.376 ; 118.542,310.604 118.618,310.68 118.618,313.055 ; 125.73,168.117 125.73,170.688 ; 126.238,266.796 126.238,269.367 ; 141.478,180.721 141.478,194.183 ; 141.986,279.4 141.986,292.862 ; 144.399,169.167 143.729,169.837 143.729,171.869 142.021,173.577 141.351,174.247 137.333,174.247 133.52,170.434 133.096,170.434 132.94,170.59 125.828,170.59 125.73,170.688 ; 144.907,267.846 144.237,268.516 144.237,270.548 142.529,272.256 141.859,272.926 137.841,272.926 134.028,269.113 133.604,269.113 133.448,269.269 126.336,269.269 126.238,269.367 ; 68.707,161.036 68.732,161.061 68.732,168.404 69.037,168.709 69.037,170.129 76.2,177.292 88.07,177.292 88.773,177.995 88.773,193.929 ; 68.707,161.036 75.438,161.036 ; 69.215,259.715 75.946,259.715 ; 69.215,259.715 69.24,259.74 69.24,267.083 69.545,267.388 69.545,268.808 76.708,275.971 88.578,275.971 89.281,276.674 89.281,292.608 ; 75.438,161.036 88.646,161.036 ; 75.946,259.715 89.154,259.715 ; 88.646,161.036 114.867,161.036 116.713,162.882 116.713,166.218 119.659,169.164 121.158,169.164 121.158,174.117 125.73,174.117 125.73,170.688 ; 88.773,193.929 89.027,194.183 141.478,194.183 ; 89.154,259.715 115.375,259.715 117.221,261.561 117.221,264.897 120.167,267.843 121.666,267.843 121.666,272.796 126.238,272.796 126.238,269.367 ; 89.281,292.608 89.535,292.862 141.986,292.862 ; 118.11,214.376 118.224,214.262 128.778,214.262 141.732,214.262 146.291,214.262 148.717,211.836 148.717,194.886 148.014,194.183 141.478,194.183 ; 118.618,313.055 118.732,312.941 129.286,312.941 142.24,312.941 146.799,312.941 149.225,310.515 149.225,293.565 148.522,292.862 141.986,292.862

## Other copper
Bottom Layer:
  text "NGUYỄN MINH ĐỨC 2020600901 - TRẦN TRỌNG TIẾN 2020600661 - NGÔ TUẤN ANH 2020600625 - NGUYỄN TUẤN KIỆT 2020600809 - TRẦN ĐỨC HẢI 2020600922" at 153.416,253.746 h1.6
  text "NGUYỄN MINH ĐỨC 2020600901 - TRẦN TRỌNG TIẾN 2020600661 - NGÔ TUẤN ANH 2020600625 - NGUYỄN TUẤN KIỆT 2020600809 - TRẦN ĐỨC HẢI 2020600922" at 152.908,155.067 h1.6
  text "NGUYỄN MINH ĐỨC 2020600901 - TRẦN TRỌNG TIẾN 2020600661 - NGÔ TUẤN ANH 2020600625 - NGUYỄN TUẤN KIỆT 2020600809 - TRẦN ĐỨC HẢI 2020600922" at 153.67,61.087 h1.6

## Text inside footprints (layer, text, board x,y; h text height)
C3: Top Overlay "+" at 127.254,69.692 h1.52 r90
C3_1: Top Overlay "+" at 126.492,163.672 h1.52 r90
C3_1_1: Top Overlay "+" at 127,262.351 h1.52 r90
C6: Top Overlay "+" at 125.73,84.582 h1.52 r270
C6_1: Top Overlay "+" at 124.968,178.562 h1.52 r270
C6_1_1: Top Overlay "+" at 125.476,277.241 h1.52 r270